# Altium PCB open-rally-computer_testscreen.pcbdoc
Units mil, origin at the board's own origin, x right, y up, seen from the top; angles counter-clockwise.
Board outline 6000 x 4000 mil, 2 copper layers (Top Layer, Bottom Layer); 9 components, 13 nets, 52 pads, 0 vias.
Unrouted connection lines stored in the file: 31.
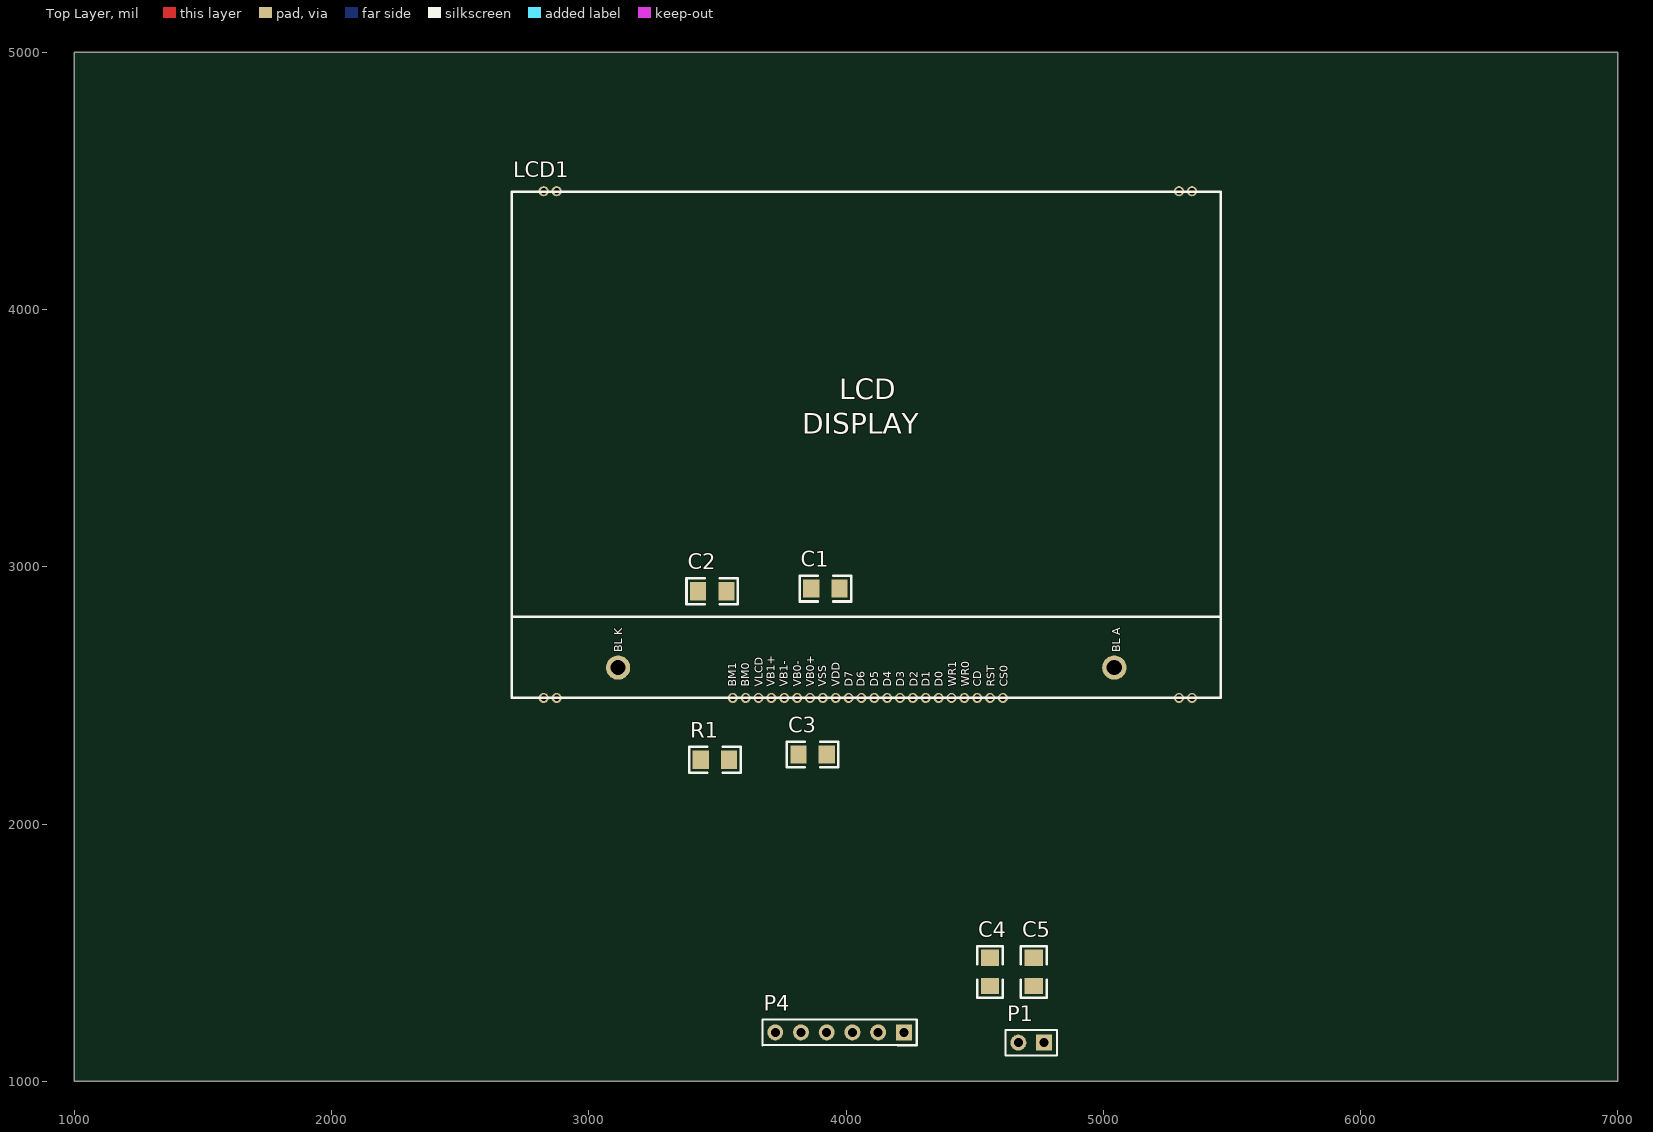
[diagram p0: Top Layer view]
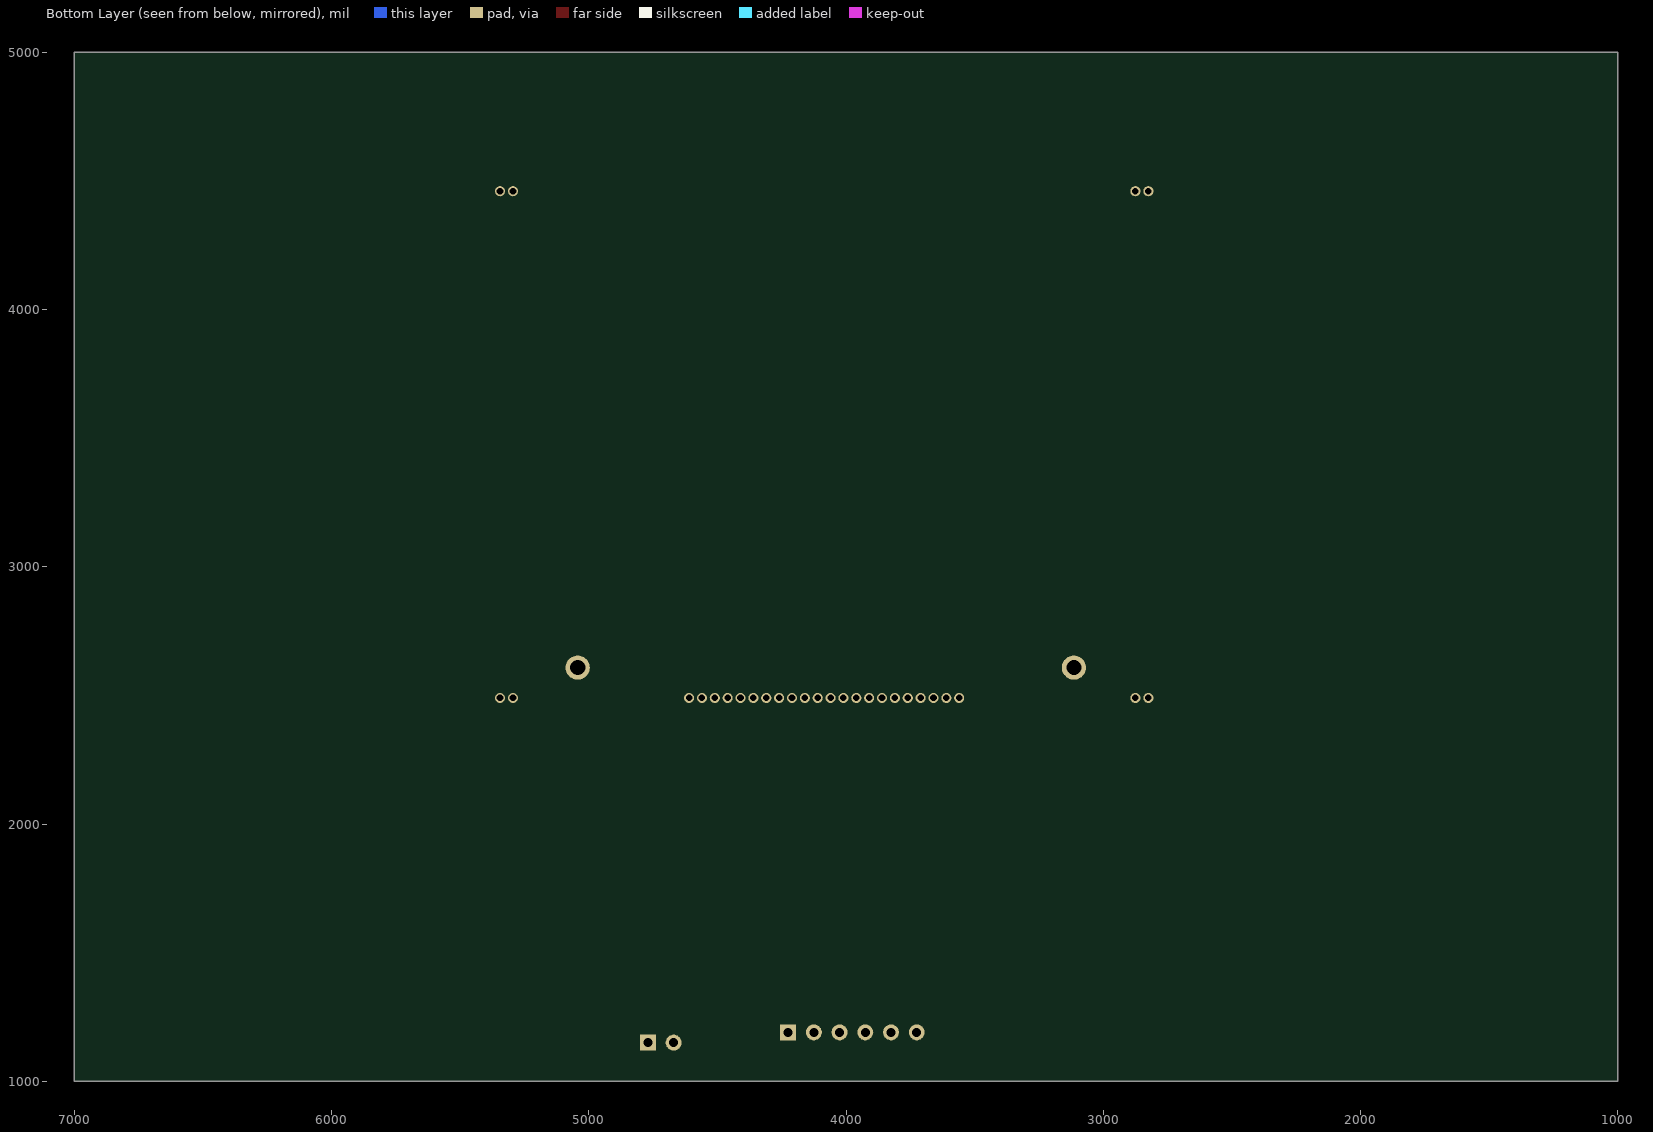
[diagram p1: Bottom Layer view, seen from below]

## Layer stack, top to bottom
Top Solder: solder mask 0.4, Solder Resist, Dk 3.5
Top Layer: signal copper 1.4
Dielectric 1: dielectric 12.6, FR-4, Dk 4.8
Bottom Layer: signal copper 1.4
Bottom Solder: solder mask 0.4, Solder Resist, Dk 3.5

## Board outline
1000,1000 7000,1000 7000,5000 1000,5000

## Design rules (kind name [scope] priority, off if disabled: settings)
Clearance [All] p1: gap=10 ignorepadtopadclearanceinfootprint=FALSE except(0: Arc-Hole Track-Hole SMDPad-Hole THPad-Hole Via-Hole Fill-Hole Poly-Hole Region-Hole Text-Hole)
PolygonConnect [All] p1: connectstyle=Relief reliefconductorwidth=10 reliefentries=4 polygonreliefangle="90 Angle" airgapwidth=10
RoutingVias [All] p1: holewidth=28 width=50 viastyle="Through Hole" minholewidth=28 minwidth=50 maxholewidth=28 maxwidth=50
SolderMaskExpansion [All] p1: expansion=4 istentingtop=FALSE
Width [All] p1: maxlimit=10 minlimit=10 preferedwidth=10
30 further rules are at their usual default settings.

## Components (designator, comment, footprint, x,y, rotation, side; value= is the part's Value field where it differs from the comment)
C1 "2.2uF" 1206 3920.05,2915.05 r180 top
C2 "2.2uF" 1206 3479.95,2904.95 r0 top
C3 "0.33uF" 1206 3869.95,2269.95 r0 top
C4 "0.1uF" 1206 4560,1425 r90 top
C5 "10uF" 1206 4730,1425 r90 top
LCD1 "ERC12864-655 128x64 LCD Display" ERC12864-655 5456.41,2490.03 r0 top
P1 "Header-Female-2.54_1x2" HDR-1X2/2.54 4770,1150 r180 top
P4 "Header-Female-2.54_1x6" HDR-6X1/2.54 3975,1190 r180 top
R1 "10M" 1206 3490.05,2250.05 r180 top

## Footprints (in the part's own frame and the unit in brackets; to place one, negate y for a bottom-side part, rotate by r counter-clockwise, add the part's x,y. Pads: shape width x height; smd on the part's side, far side on the other; paste and mask are expansions set on the pad)
1206 [mil]
  rect 63x70.9 smd: 1(55.05,0.05) 2(-54.95,0.05)
  silkscreen extent -100,-50 100,50
ERC12864-655 [mm]
  round 1 hole 0.65: 1(-21.499,-0.001) 2(-22.769,-0.001) 3(-24.039,-0.001) 4(-25.309,-0.001) 5(-26.579,-0.001) 6(-27.849,-0.001) 7(-29.119,-0.001) 8(-30.389,-0.001) 9(-31.659,-0.001) 10(-32.929,-0.001) 11(-34.199,-0.001) 12(-35.469,-0.001) 13(-36.739,-0.001) 14(-38.009,-0.001) 15(-39.279,-0.001) 16(-40.549,-0.001) 17(-41.819,-0.001) 18(-43.089,-0.001) 19(-44.359,-0.001) 20(-45.629,-0.001) 21(-46.899,-0.001) 22(-48.169,-0.001) ""(-66.848,-0.001) ""(-66.848,50.037) ""(-65.568,-0.001) ""(-65.568,50.037) ""(-4.11,50.037) ""(-4.11,-0.001) ""(-2.83,-0.001) ""(-2.83,50.037)
  round 2.4 hole 1.5: 23(-10.499,2.999) 24(-59.499,2.999)
  silkscreen extent -70,0 0,50
HDR-1X2/2.54 [mil]
  rect 62x62 hole 35: 1(0,0)
  round 62 hole 35: 2(100,0)
  silkscreen extent -50,-49 150,50
HDR-6X1/2.54 [mil]
  rect 62x62 hole 35: 1(-250,0)
  round 62 hole 35: 2(-150,0) 3(-50,0) 4(50,0) 5(150,0) 6(250,0)
  silkscreen extent -300,-50 300,50

## Part data
C1 C2 C3 C4 C5 R1: BOM_Manufacturer Part=?
  C1 C2 C3 C4 C5: nameAlias=Value(F), spicePre=C, spiceSymbolName=Cap_1206_EU
  R1: nameAlias=Value(Ω), spicePre=R, spiceSymbolName=Res_1206(1/4W)_EU
LCD1: BOM_Manufacturer="EastRising Technology Co.", BOM_Manufacturer Part=ERC12864-655, BOM_Supplier=BuyDisplay.com, BOM_Supplier Part=ERC12864-655, Contributor=mattogodoy, link=https://www.buydisplay.com/download/manual/ERC12864-655_Series_Datasheet.pdf, spicePre=L
P1: BOM_Manufacturer=BOOMELE, BOM_Manufacturer Part=2.54-1*2PFemale, BOM_Supplier=LCSC, BOM_Supplier Part=C49661, Contributor=LCSC, image=//image.lceda.cn/szlcsc/C49661.jpg, spicePre=P
P4: BOM_Manufacturer=BOOMELE, BOM_Manufacturer Part="Female header 1*6p", BOM_Supplier=LCSC, BOM_Supplier Part=C40877, spicePre=P

## Nets (pads, with @x,y where several pads share a name; then routed paths per layer and width w, separated by ;. In a path a pad name is that pad's centre, name@x,y a point inside that pad or via, vN(x,y) a via of type N, cw(c..) or ccw(c..) an arc to the next point about the centre after c; other vN are vias at no path point)
3V3: C4.1 C5.1 LCD1.14 P1.2
DISPLAY_BL: LCD1.23 P4.6
DISPLAY_CD: LCD1.3 P4.3
DISPLAY_CS: LCD1.1 P4.1
DISPLAY_DATA: LCD1.13 P4.5
DISPLAY_RST: LCD1.2 P4.2
DISPLAY_SCLK: LCD1.12 P4.4
GND: C3.1 C4.2 C5.2 LCD1.4 LCD1.5 LCD1.6 LCD1.7 LCD1.8 LCD1.9 LCD1.10 LCD1.11 LCD1.15 LCD1.21 LCD1.22 LCD1.24 P1.1 R1.1
NetC1_1: C1.1 LCD1.17
NetC1_2: C1.2 LCD1.16
NetC2_1: C2.1 LCD1.18
NetC2_2: C2.2 LCD1.19
NetC3_2: C3.2 LCD1.20 R1.2
pads on no net: LCD1.

## Text inside footprints (layer, text, board x,y; h text height)
LCD1: Top Overlay "DISPLAY" at 3829.68,3516.39 h80; Top Overlay "LCD" at 3974.32,3651.39 h80; Top Overlay "CS0" at 4628.57,2533.35 h31.5 r90; Top Overlay "RST" at 4577.39,2533.35 h31.5 r90; Top Overlay "CD" at 4526.21,2533.35 h31.5 r90; Top Overlay "WR0" at 4478.97,2533.35 h31.5 r90; Top Overlay "WR1" at 4427.79,2533.35 h31.5 r90; Top Overlay "D0" at 4376.6,2533.35 h31.5 r90; Top Overlay "D1" at 4325.42,2533.35 h31.5 r90; Top Overlay "D2" at 4278.18,2533.35 h31.5 r90; Top Overlay "D3" at 4227,2533.35 h31.5 r90; Top Overlay "D4" at 4175.82,2533.35 h31.5 r90; Top Overlay "D5" at 4124.64,2533.35 h31.5 r90; Top Overlay "D6" at 4073.45,2533.35 h31.5 r90; Top Overlay "D7" at 4026.21,2533.35 h31.5 r90; Top Overlay "VDD" at 3975.04,2533.35 h31.5 r90; Top Overlay "VSS" at 3923.85,2533.35 h31.5 r90; Top Overlay "VB0+" at 3876.61,2533.35 h31.5 r90; Top Overlay "VB0-" at 3825.42,2533.35 h31.5 r90; Top Overlay "VB1-" at 3774.24,2533.35 h31.5 r90; Top Overlay "VB1+" at 3723.07,2533.35 h31.5 r90; Top Overlay "VLCD" at 3675.82,2533.35 h31.5 r90; Top Overlay "BM0" at 3624.64,2533.35 h31.5 r90; Top Overlay "BM1" at 3573.46,2533.35 h31.5 r90; Top Overlay "BL K" at 3129.73,2667.14 h31.5 r90; Top Overlay "BL A" at 5065.58,2667.21 h31.5 r90